# EAGLE board Watch (EAGLE 6.5.0)
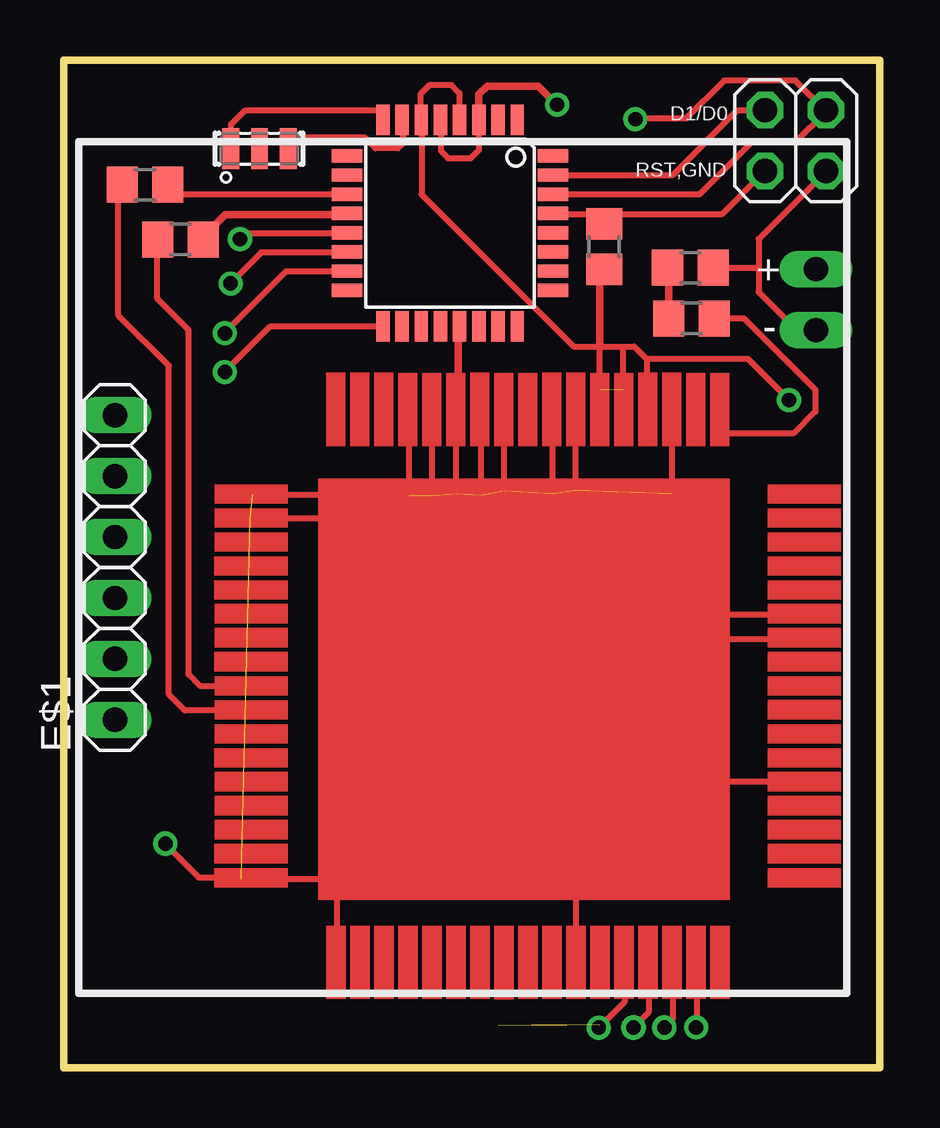
[diagram p0: board, top side]
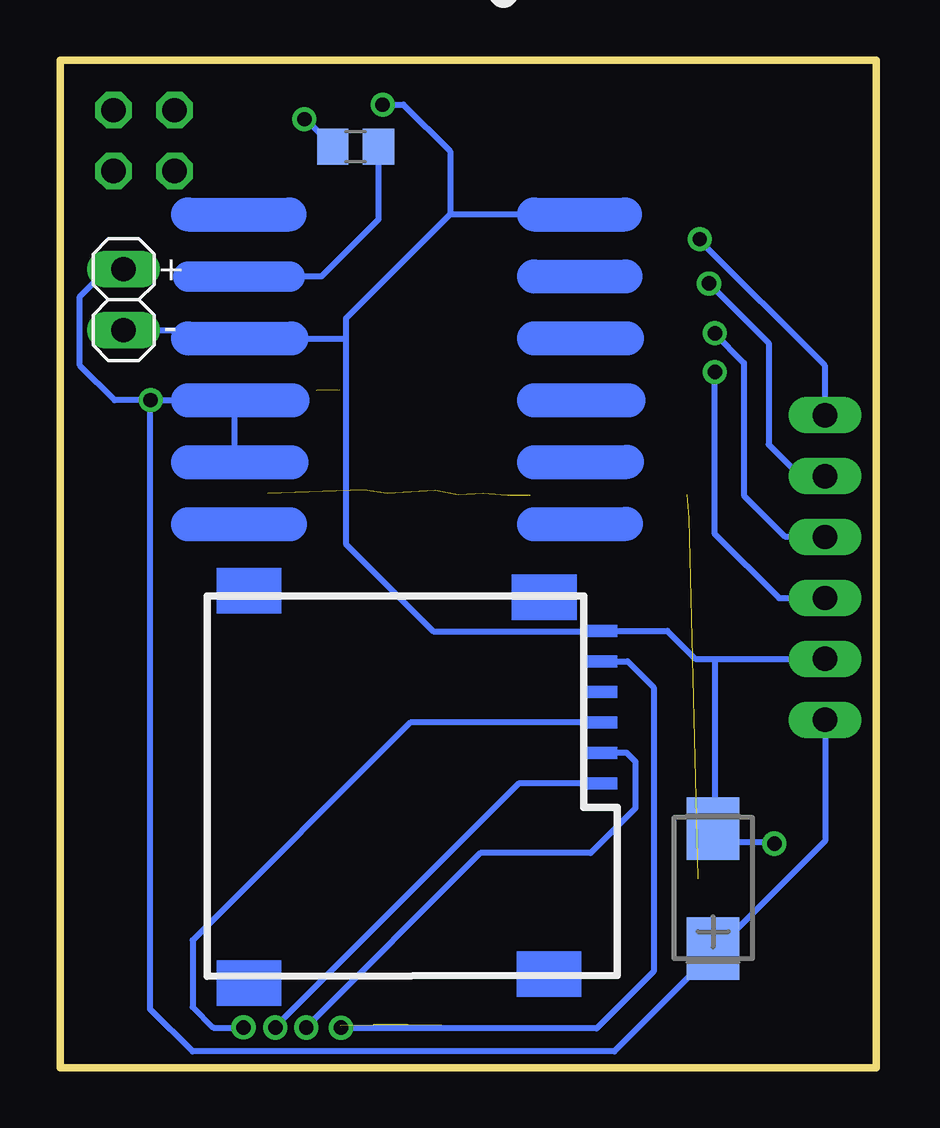
[diagram p1: board, bottom side, seen from below]

Size 34 x 42 mm. Coordinates in mm from the lower left corner, seen from the top.
Outline: 0,42 34,42 34,0 0,0 0,42
Copper layers (1*16): Top 0.035mm / dielectric 1.5mm / Bottom 0.035mm
Design rules "default": minimum track width 10mil, minimum drill 24mil, track to track 8mil, track to pad 8mil, pad to pad 8mil, via to via 8mil, smd to smd 8mil, copper to edge 40mil, drill to drill 8mil, minimum pad ring 10mil, minimum via ring 8mil, stop-mask expansion 4mil, vias tented up to drill 0mil, thermal gap 10mil

## Footprints (pad centres in the part's own frame; a part is rotated, then mirrored left to right if it is on the bottom)
TQFP32-08 = smd 1.27 x 0.559: 1 -4.293,2.8; 2 -4.293,2; 3 -4.293,1.2; 4 -4.293,0.4; 5 -4.293,-0.4; 6 -4.293,-1.2; 7 -4.293,-2; 8 -4.293,-2.8; 17 4.293,-2.8; 18 4.293,-2; 19 4.293,-1.2; 20 4.293,-0.4; 21 4.293,0.4; 22 4.293,1.2; 23 4.293,2; 24 4.293,2.8 | smd 0.559 x 1.27: 9 -2.8,-4.293; 10 -2,-4.293; 11 -1.2,-4.293; 12 -0.4,-4.293; 13 0.4,-4.293; 14 1.2,-4.293; 15 2,-4.293; 16 2.8,-4.293; 25 2.8,4.293; 26 2,4.293; 27 1.2,4.293; 28 0.4,4.293; 29 -0.4,4.293; 30 -1.2,4.293; 31 -2,4.293; 32 -2.8,4.293
1X06 = drill 1.016 long: 1 -6.35,0; 2 -3.81,0; 3 -1.27,0; 4 1.27,0; 5 3.81,0; 6 6.35,0
CT6032 = smd 2.6 x 2.2: + -2.5,0; - 2.5,0
2X02 = drill 1.016 octagon: 1 -1.27,-1.27; 2 -1.27,1.27; 3 1.27,-1.27; 4 1.27,1.27
X3-SMD-3.6X1.3X0.8MM = smd 0.7 x 1.7: 1 -1.2,0; 2 0,0; 3 1.2,0
R0805 = smd 1.3 x 1.5: 1 -0.95,0; 2 0.95,0
1X02 = drill 1.016 long: 1 -1.27,0; 2 1.27,0

## Placement (x,y rotation side)
ATMEGA  [TQFP32-08]  16.1,35.2 270 top
E$1  [1X06]  2.13,20.84 90 top
E$2  [CT6032]  6.79,7.47 90 bottom
E$3  [2X02]  30.5,38.64 0 top
E$7  [X3-SMD-3.6X1.3X0.8MM]  8.16,38.31 0 top
LED1  [R0805]  22.51,34.22 90 top
LED2  [R0805]  21.68,38.39 180 bottom
LED4  [R0805]  26.11,33.34 180 top
POWER  [1X02]  31.35,32.01 90 bottom
R1  1k  [R0805]  4.87,34.51 0 top
R2  1k  [R0805]  3.38,36.79 0 top
R12  1k  [R0805]  26.16,31.23 180 top

## Library data of the parts
ATMEGA = Arduino-AVR
E$1 E$3 POWER = pinhead
E$2 = smd-ipc
E$7 = SMD-RESONATOR-16MHZ-15PF-0.5_-40R_3P-3.2X1.3MM_
LED1 LED2 LED4 R1 R2 R12 = eagle-ltspice

## Tracks (layer width: path | path; a pad name or v marks a point on that pad's centre or on a via)
S$1
  Top 0.254: 15.71,39.16 15.71,38.21 16.02,37.9 16.95,37.9 17.31,38.26 17.31,39.35
S$2
  Top 0.305: 16.45,31 16.45,27.67
S$3
  Top 0.254: 14.88,39.65 14.88,40.59 15.26,40.96 16.15,40.96 16.49,40.62 16.49,39.28
S$4
  Top 0.254: 7.3,15.89 5.7,15.89 5.21,16.38 5.21,30.74 3.9,32.05 3.9,34.55
S$5
  Top 0.254: 7.96,14.88 5.04,14.88 4.38,15.55 4.38,29.25 2.28,31.35 2.28,36.78
S$6
  Top 0.254: 11.97,36.39 4.53,36.39
S$7
  Top 0.254: 27.3,24.05 27.3,24.1
S$8
  Bottom 0.254: 25.01,30.38 22.09,30.38
S$9
  Bottom 0.254: 4.2,9.38 6.57,9.38
S$10
  Top 0.254: 11.88,34.75 7.52,34.75 7.34,34.57
S$11
  Top 0.254: 11.86,33.98 8.23,33.98 6.94,32.69
S$12
  Top 0.254: 11.82,33.18 9.25,33.18 6.7,30.63
S$13
  Top 0.254: 4.2,9.34 5.62,7.92 7.06,7.92
S$14  (3 unrouted)
S$15  (via drill 0.6)
  other vias: 4.23,9.34
S$16  (via drill 0.6)
  other vias: 6.72,29
S$17  (via drill 0.6)
  other vias: 6.72,30.61
S$18
  Top 0.305: 5.72,34.56 6.72,35.56 11.86,35.56
S$19  (via drill 0.6)
  other vias: 20.56,40.14
S$20  (via drill 0.6)
  other vias: 6.96,32.68
S$21  (via drill 0.6)
  other vias: 23.82,39.53
S$22  (via drill 0.6)
  other vias: 7.34,34.53
S$23  (via drill 0.6)
  other vias: 30.22,27.82
S$24
  Bottom 0.254: 20.59,40.14 19.7,40.14 17.74,38.19 17.74,35.56 13.24,35.56
S$25  (via drill 0.6)
  other vias: 26.35,1.67
S$26  (via drill 0.6)
  other vias: 25.03,1.67
S$27
  Top 0.254: 13.31,39.88 7.54,39.88 6.97,39.31 6.97,38.33
S$28
  Top 0.254: 14.12,39.25 14.12,38.52 13.92,38.32 12.99,38.32 12.56,38.75 9.36,38.75
S$29
  Top 0.254: 14.91,39.35 14.91,36.39 21.24,30.05 23.77,30.05 24.3,29.52 24.3,28.22
S$30  (via drill 0.6)
  other vias: 23.74,1.67
S$31  (via drill 0.6)
  other vias: 22.29,1.66
S$32
  Top 0.254: 26.37,3.56 26.37,1.66
S$33
  Top 0.254: 25.38,3.71 25.38,2.04 25.02,1.68
S$34
  Top 0.254: 24.37,3.85 24.37,2.3 23.75,1.69
S$35
  Top 0.254: 23.37,3.94 23.37,2.73 22.27,1.64
S$36
  Bottom 0.254: 11.36,13.13 10.4,13.13 10.03,12.76 10.03,10.8 11.89,8.95 16.48,8.95 23.77,1.67
S$37
  Bottom 0.254: 11.38,16.94 10.35,16.94 9.27,15.85 9.27,4.01 11.64,1.64 22.31,1.64
S$38
  Top 0.254: 13.34,30.88 8.59,30.88 6.73,29.02
S$39
  Bottom 0.254: 11.39,11.84 14.89,11.84 25.05,1.68
S$40
  Bottom 0.254: 11.4,14.38 19.4,14.38 28.48,5.31 28.48,2.52 27.61,1.66 26.38,1.66
S$41
  Top 0.254: 24.3,29.55 28.5,29.55 30.23,27.81
S$42
  Bottom 0.254: 25.83,30.27 23.95,30.27
S$43
  Bottom 0.254: 20.73,38.34 20.73,35.35 23.11,32.97 26.5,32.97
S$44  (1 unrouted)
  Top 0.254: 22.34,28.26 22.34,30.03 | 23.32,28.25 23.32,30.02
S$45
  Top 0.254: 27.14,31.23 28.34,31.23 31.32,28.26 31.32,27.34 30.41,26.43 27.37,26.43
S$46
  Bottom 0.254: 30.25,27.81 31.72,27.81 33.17,29.26 33.17,32.14 32.04,33.27 31.36,33.27
S$47
  Bottom 0.254: 6.73,29.03 6.73,22.27 4.03,19.57 2.17,19.57
S$48
  Bottom 0.254: 6.75,30.61 5.5,29.37 5.5,23.85 3.8,22.14 2.22,22.14
S$49
  Bottom 0.254: 6.97,32.7 4.47,30.2 4.47,25.97 3.15,24.65 2.16,24.65
S$50
  Bottom 0.254: 7.4,34.53 2.14,29.27 2.14,27.2
S$51
  Bottom 0.254: 2.12,14.43 2.12,9.45 10.9,0.67 28.47,0.67 30.24,2.44 30.24,27.81
S$52
  Bottom 0.305: 28.87,27.89 26.06,27.89
S$53
  Bottom 0.254: 28.29,27.81 30.22,27.81
S$54
  Bottom 0.254: 11.44,18.2 8.7,18.2 7.53,17.03 2.17,17.03
S$55
  Top 0.254: 20.33,35.58 27.44,35.58 29.18,37.32
S$56
  Bottom 0.254: 23.81,39.57 22.65,38.41
S$57
  Top 0.305: 22.33,33.2 22.33,30.1
S$58
  Top 0.254: 31.78,37.36 28.96,34.53 28.96,32.33 30.53,30.76
S$59
  Top 0.254: 27.06,33.34 28.91,33.34
S$60
  Top 0.305: 25.21,31.29 25.21,33.52
S$61
  Top 0.254: 20.3,36.4 26.5,36.4 28.69,38.59 30.51,38.59 31.75,39.83
S$62
  Top 0.254: 20.38,37.21 25.38,37.21 28.06,39.9 29.21,39.9
S$63
  Bottom 0.254: 6.71,9.99 6.71,17.01
S$64
  Top 0.305: 20.56,40.12 19.76,40.91 17.64,40.91 17.3,40.57 17.3,39.64
S$65
  Bottom 0.254: 31.4,30.74 28.45,30.74
S$66
  Bottom 0.305: 28.6,30.28 27.32,30.28
S$68
  Top 0.254: 31.77,39.86 30.48,41.14 27.52,41.14 25.93,39.55 23.83,39.55
S$69
  Bottom 0.254: 17.73,35.58 22.09,31.23 22.09,21.83 18.44,18.18 11.34,18.18
S$74
  Bottom 0.254: 11.49,18.23
S$77
  Top 0.254: 26.75,7.27 26.48,7.54
S$141
  Top 0.305: 23.34,4.26 23.34,3.08
S$157  (2 unrouted)
  Top 0.254: 7.87,23.88 11.84,23.88 | 7.78,22.9 11.75,22.9 | 7.4,7.86 11.37,7.86
S$191
  Bottom 0.254: 28.13,27.91 28.16,27.94
S$198  (7 unrouted)
  Top 0.254: 25.35,23.93 25.35,27.12 | 14.4,23.84 14.4,27.03 | 15.36,23.84 15.36,27.03 | 16.36,23.93 16.36,27.11 | 17.4,23.87 17.4,27.06 | 18.36,24.06 18.36,27.24 | 20.37,23.94 20.37,27.12 | 21.34,24.07 21.34,27.26
S$199
  Top 0.254: 25.78,17.86 31.09,17.86
S$249
  Bottom 1.422: 28.66,22.66 24.41,22.66
S$250
  Bottom 1.422: 28.66,25.23 24.36,25.24
S$251
  Bottom 1.422: 28.66,27.82 24.3,27.82
S$252
  Bottom 1.422: 28.66,30.39 24.36,30.4
S$253
  Bottom 1.27: 28.66,32.98 24.42,32.98
S$254
  Bottom 1.422: 28.66,35.55 24.45,35.56
S$255
  Bottom 1.422: 14.25,22.66 10.42,22.66
S$256
  Bottom 1.422: 14.25,25.24 10.37,25.24
S$257
  Bottom 1.422: 14.25,27.82 10.32,27.82
S$258
  Bottom 1.422: 14.25,30.4 10.37,30.4
S$259
  Bottom 1.422: 14.25,32.98 10.43,32.98
S$260
  Bottom 1.422: 14.25,35.56 10.46,35.56
S$264
  Top 0.254: 30.97,16.84 31.18,17.04
S$265
  Top 0.254: 30.99,16.03 31.3,15.72
S$267
  Top 0.254: 11.38,7.39 11.38,5.09
S$269
  Top 0.254: 21.34,7.99 21.34,5.13
S$277
  Top 0.254: 26.52,11.94 30.81,11.94
S$278
  Top 0.254: 25.71,18.88 31.02,18.88
S$282
  Bottom 0.254: 11.68,30.4 11.66,30.41
S$285
  Bottom 0.254: 11.24,32.94 11.68,33.04
S$288
  Bottom 0.254: 11.47,33.02 11.41,32.96
S$289
  Bottom 0.254: 12.43,30.5 12.45,30.48
S$291
  Bottom 0.254: 27.16,30.48 27.17,30.48
S$293
  Bottom 0.254: 12.26,35.58 12.28,35.56
S$295
  Bottom 0.254: 11.4,35.57 11.41,35.57
S$297
  Bottom 0.254: 26.72,25.25 26.72,27.88 26.71,27.89
S$298
  Bottom 0.254: 26.38,27.84 26.37,27.83
S$299
  Bottom 0.254: 12.26,35.63 14.36,35.63
S$351
  Bottom 0.254: 26.85,27.8
(copper drawn outside any net)
  shapes: Bottom area x10, Top area x69

## Text on the board
tPlace: D1/D0 | RST,GND
tNames: + | -
bNames: + | -
Reference: Jumper | D1 | D0 | RST | GND